# Altium PCB RECEPTORA_SECUNDARIA.PcbDoc
Units mm, origin at the board's own origin, x right, y up, seen from the top; angles counter-clockwise.
Board outline 195 x 55 mm, 2 copper layers (Top Layer, Bottom Layer); 21 components, 14 nets, 61 pads, 10 vias.
Unrouted connection lines stored in the file: 5.
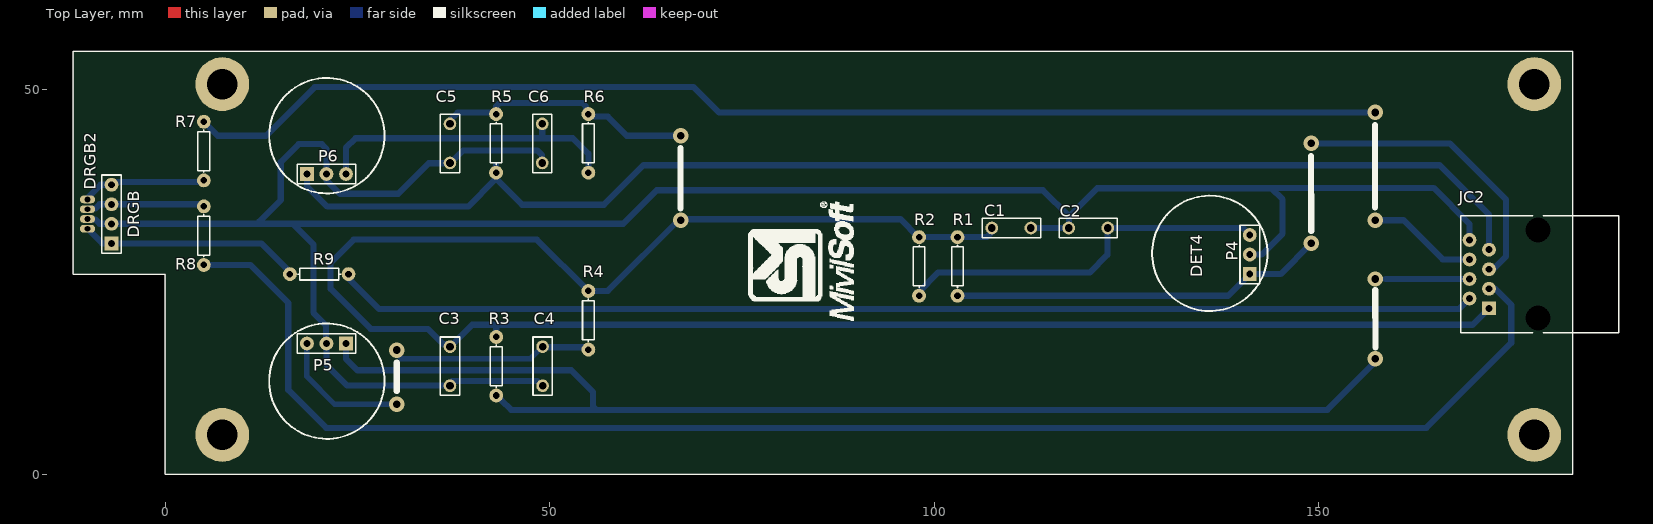
[diagram p0: Top Layer view]
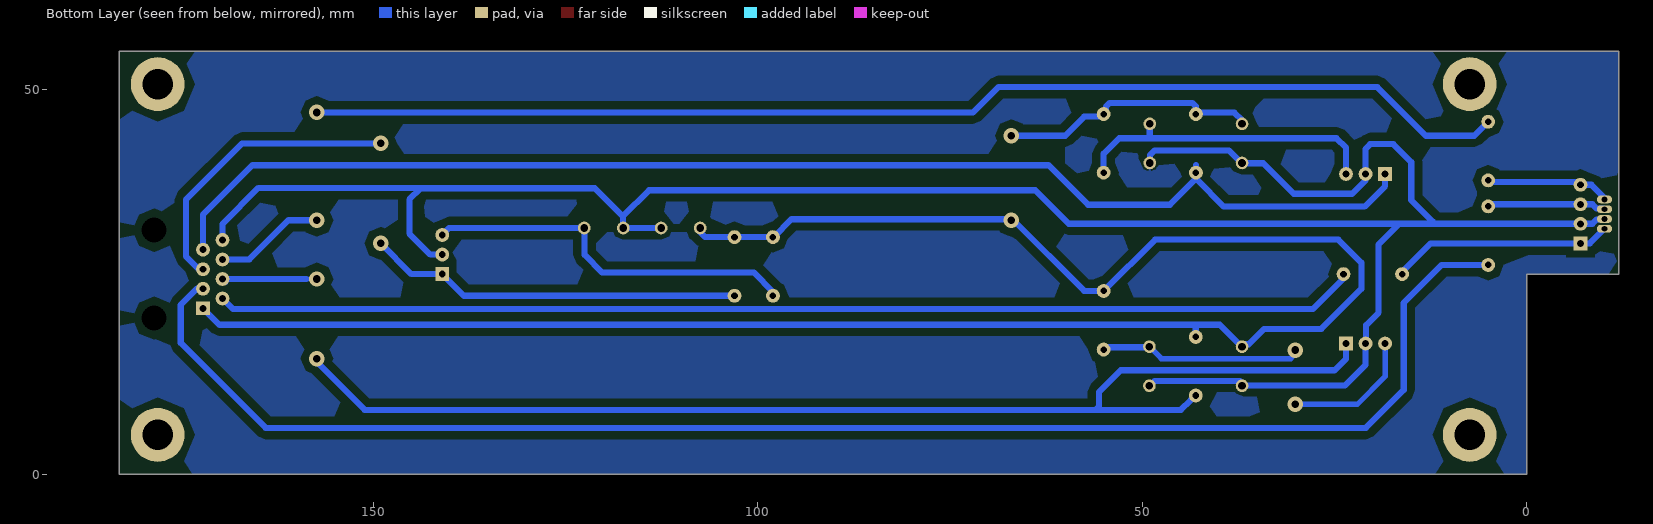
[diagram p1: Bottom Layer view, seen from below]

## Layer stack, top to bottom
Top Solder: solder mask 0.0102, Solder Resist, Dk 3.5
Top Layer: signal copper 0.0356
Dielectric 1: dielectric 0.32, FR-4, Dk 4.8
Bottom Layer: signal copper 0.0356
Bottom Solder: solder mask 0.0102, Solder Resist, Dk 3.5

## Board outline
-12,26 0,26 0,0 183,0 183,55 -12,55

## Design rules (kind name [scope] priority, off if disabled: settings)
Clearance "POLIGONO GND BOTTON" [(InNamedPolygon('GND BOTTON'))] p1: gap=1
Clearance [All] p2: gap=0.3
PolygonConnect [All] p1: connectstyle=Relief reliefconductorwidth=0.254 reliefentries=4 polygonreliefangle="90 Angle" airgapwidth=0.254
RoomDefinition RECEPTORA_SECUNDARIA [InComponentClass('RECEPTORA_SECUNDARIA')] p1: confinementstyle=ConfineIn formatcopy=TRUE lockcomponents=FALSE outline -11.95,0.075 183,0.075 183,54.975 -11.95,54.975
RoutingVias [All] p1: holewidth=0.711 width=1.27 viastyle="Through Hole" minholewidth=0.711 minwidth=1.27 maxholewidth=0.711 maxwidth=1.27
SolderMaskExpansion [All] p1: expansion=0.102
Width [All] p1: maxlimit=1 minlimit=0.7 preferedwidth=0.8
29 further rules are at their usual default settings.

## Components (designator, comment, footprint, x,y, rotation, side; value= is the part's Value field where it differs from the comment)
C1 "VP44BY224JB" VP44-2.5 110,32 r180 top
C2 "VP44BY224JB" VP44-2.5 120,32 r180 top
C3 "VP44BY224JB" VP44-2.5 37,14.025 r90 top
C4 "VP44BY224JB" VP44-2.5 49.05,14.025 r270 top
C5 "VP44BY224JB" VP44-2.5 37,43 r90 top
C6 "VP44BY224JB" VP44-2.5 49,43 r270 top
DRGB "Header 4" HDR1X4 -7,30 r90 top
DRGB2 "Header 4" FP_LRGB_TH -10.125,31.905 r90 top
JC2 "RJ45" 15-43-6233 189,26 r90 top
P4 "Header 3" HDR1X3 141,26 r90 top
P5 "Header 3" HDR1X3 23.48,16.975 r180 top
P6 "Header 3" HDR1X3 18.4,39.025 r0 top
R1 "Res" AXIAL-0.3 103,27 r90 top
R2 "Res" AXIAL-0.3 98,27 r270 top
R3 "Res" AXIAL-0.3 43.025,14.025 r90 top
R4 "Res" AXIAL-0.3 55,20 r270 top
R5 "Res" AXIAL-0.3 43,43 r90 top
R6 "Res" AXIAL-0.3 55,43 r270 top
R7 "Res" AXIAL-0.3 5,42 r90 top
R8 "Res" AXIAL-0.3 5,31 r270 top
R9 "Res" AXIAL-0.3 20,26 r0 top

## Footprints (in the part's own frame and the unit in brackets; to place one, negate y for a bottom-side part, rotate by r counter-clockwise, add the part's x,y. Pads: shape width x height; smd on the part's side, far side on the other; paste and mask are expansions set on the pad)
15-43-6233 [mm] "Connector; PCB Jack, Thru-Hole; 1-Port; Unshielded without Lightpipes; Right Angle"
  rect 1.8x1.8 hole 0.9: 1(-4.445,16.89)
  round 1.8 hole 0.9: 2(-3.175,19.43) 3(-1.905,16.89) 4(-0.635,19.43) 5(0.635,16.89) 6(1.905,19.43) 7(3.175,16.89) 8(4.445,19.43)
  round 1.8 hole 3.25 unplated: MH1(-5.715,10.54) MH2(5.715,10.54)
  silkscreen extent -7.62,0 7.62,20.58
AXIAL-0.3 [mm] "Axial Device, Thru-Hole; 2 Leads; 0.3 in Pin Spacing"
  round 1.8 hole 0.85: 1(-3.81,0) 2(3.81,0)
  silkscreen extent -2.77,-0.76 2.77,0.76
FP_LRGB_TH [mm]
  oval 1x2 hole 0.75: 1(0,0) 2(1.27,0) 3(2.54,0) 4(3.81,0)
HDR1X3 [mm] "Connector; Header; 3 Position"
  rect 1.8x1.8 hole 0.9: 1(0,0)
  round 1.8 hole 0.9: 2(2.54,0) 3(5.08,0)
  silkscreen extent -1.27,-1.27 6.35,1.27
HDR1X4 [mm] "Connector; Header; 4 Position"
  rect 1.8x1.8 hole 0.9: 1(0,0)
  round 1.8 hole 0.9: 2(2.54,0) 3(5.08,0) 4(7.62,0)
  silkscreen extent -1.27,-1.27 8.89,1.27
VP44-2.5 [mm] "Capacitor, Ceramic, Thru-Hole, Dipped Radial; Body 7.6 x 2.5 mm (WxT) Pin Spacing 5.08 mm (typ)"
  round 1.65 hole 1: 1(-2.54,0) 2(2.54,0)
  silkscreen extent -3.8,-1.25 3.8,1.25

## Part data
C1 C2 C3 C4 C5 C6: "Dipped Radial Multilayer Ceramic Capacitor X7R: 220nF, 100V"
DRGB DRGB2: "Header, 4-Pin"
JC2: library part 15-43-6233, "Right Angle, Standard Profile, RJ45-Keyed, Flange Mount PCB Jack"
P4 P5 P6: "Header, 3-Pin"
R1 R2 R3 R4 R5 R6 R7 R8 R9: library part Res1, "Resistor"

## Free pads (board coordinates)
  round 7 hole 4: 0(7.4,5.1) 0(7.4,50.7) 0(178,5.1) 0(178,50.7)

## Via types
v1: diameter 2, hole 1, Top Layer to Bottom Layer, 10 vias

## Nets (pads, with @x,y where several pads share a name; then routed paths per layer and width w, separated by ;. In a path a pad name is that pad's centre, name@x,y a point inside that pad or via, vN(x,y) a via of type N, cw(c..) or ccw(c..) an arc to the next point about the centre after c; other vN are vias at no path point)
5VCC: C1.2 C3.2 C5.2 JC2.1 R1.2 R2.1 R3.2 R4.1 R5.2 R6.1 | length 289.1
  Bottom Layer w0.8: C5.2@37,46 38,47 R5.2@42.375,47 ; R3.2 43.025,19.35 43.1,19.425 ; R5.2@43.025,47.125 43.025,47.835 43.44,48.25 54.25,48.25 54.69,47.81 54.69,47.01 55.213,46.488 57.513,46.488 60,44 v1(67,44) ; C1.2@107.5,32 107.5,31.5 106.81,30.81 R1.2 97.915,30.81 95.6,33.125 66.85,33.125 57.535,23.81 R4.1 48.31,30.5 24.5,30.5 21.475,27.475 21.475,24.1 26.7,18.875 34.125,18.875 36.125,16.875 37.35,16.875 39.9,19.425 43.1,19.425 ; JC2.1 169.98,19.425 43.1,19.425
  other v1: 67,33
DET_4: JC2.5 P4.1 R1.1 | length 87.4
  Bottom Layer w0.8: R1.1 138.19,23.19 P4.1 145,26 v1(149,30) ; v1(149,43) 167,43 174.325,35.675 174.325,28.325 172.635,26.635 JC2.5
DET_5: JC2.6 P5.1 R3.1 | length 169.9
  Bottom Layer w0.8: P5.1 23.48,14.995 24.975,13.5 52.775,13.5 55.6,10.675 55.6,8.8 55.95,8.45 ; R3.1@42.765,10.215 R3.1 ; R3.1@43.688,9.612 44.95,8.35 151.1,8.35 157,14.25 v1@157,15 ; v1(157.3,33) 161,33 166.095,27.905 JC2.6
  other v1: 157.3,15
GND: C1.1 C2.2 C3.1 C4.2 C5.1 C6.2 DRGB2.2 DRGB.2 JC2.8 P4.2 P5.2 P6.2 | length 309.5
  Bottom Layer w0.8: DRGB2.2 -10.055,33.105 -9.128,33.105 -8.563,32.54 DRGB.2 16.575,32.54 ; 12.2,32.825 15,35.625 15,40.575 17.325,42.9 20.325,42.9 20.94,42.285 P6.2 20.94,38.21 22.7,36.45 30.275,36.45 34.25,40.425 37.05,40.425 38.7,42.075 48.385,42.075 48.975,41.485 C6.2@48.975,41.075 ; P5.2@20.875,16.75 20.875,19.375 19.25,21 19.25,29.865 16.575,32.54 ; P5.2 20.94,14.21 23.61,11.54 36.715,11.54 37.3,12.125 48.375,12.125 C4.2@49,11.5 ; C1.1@112.5,32 117.5,32 117.5,33.5 ; P4.2 142.54,28.54 145.275,31.275 145.275,35.725 143.825,37.175 121.175,37.175 117.5,33.5 ; 143.35,37.2 164.9,37.2 169.57,32.53 JC2.8 ; 16.575,32.54 59.54,32.54 63.9,36.9 114.1,36.9 117.5,33.5
NetC4_1: C4.1 P5.3 R4.2 | length 43.8
  Bottom Layer w0.7: P5.3 18.4,12.7 22.025,9.075 v1@30.125,9.075 ; v1(30.075,16.125) 30.075,15.6 30.675,15 47.5,15 C4.1@49,16.5
  Bottom Layer w0.8: C4.1@49,16.5 R4.2@55,16.5
  other v1: 30.075,9.075
NetC6_1: C6.1 P6.3 R6.2 | length 39.4
  Bottom Layer w0.8: P6.3 23.48,42.43 24.725,43.675 48.825,43.675 ; C6.1 49,43.675 52.975,43.675 55,41.65 55,40.19
NetDRGB2_1: DRGB2.1 DRGB.1 R9.1 | length 28.9
  Bottom Layer w0.8: DRGB2.1 -8.22,30 DRGB.1 12.475,30 16.19,26.285 R9.1
NetDRGB2_3: DRGB2.3 DRGB.3 R8.1 | length 15.4
  Bottom Layer w0.8: DRGB2.3@-10.055,34.515 -9.128,34.515 -8.563,35.08 DRGB.3 4.73,35.08 R8.1
NetDRGB2_4: DRGB2.4 DRGB.4 R7.1 | length 15.9
  Bottom Layer w0.8: DRGB2.4@-10.125,35.925 -8.43,37.62 DRGB.4 ; DRGB.4@-7,38 4.81,38 R7.1
OUT_IR6: JC2.7 P6.1 R5.1 | length 170.2
  Bottom Layer w0.8: P6.1 18.4,37.45 21.075,34.775 39.375,34.775 42.85,38.25 ; 43,40.19 43,38.4 46.375,35.025 57.025,35.025 62.15,40.15 165.681,40.15 172.11,33.721 JC2.7
SA: JC2.3 R8.2 | length 198.7
  Bottom Layer w0.8: R8.2 11.035,27.19 15.975,22.25 15.975,10.95 20.925,6 163.95,6 175,17.05 175,22 172.905,24.095 JC2.3
SR: JC2.2 R9.2 | length 148.5
  Bottom Layer w0.8: R9.2 23.81,25.44 27.8,21.45 168.195,21.45 JC2.2
SV: JC2.4 R7.2 | length 168.5
  Bottom Layer w0.8: R7.2 6.81,44 13.1,44 19.425,50.325 68.675,50.325 72,47 v1@157.3,47 ; 158.635,25.365 JC2.4 JC2.4@169.205,25
  other v1: 157.3,25.365 157.3,47.025
VS: C2.1 P4.3 R2.2 | length 49.4
  Bottom Layer w0.8: R2.2 98,23.74 100.45,26.19 120.19,26.19 122.5,28.5 122.5,32 140.08,32 P4.3
pads on no net: JC2.MH1 JC2.MH2

## Polygon pours and split planes (outlines as drawn)
GND on Bottom Layer "GND BOTTON" (solid, pour order 3): -12,55 183,55 183,0 0,0 0,26 -12,26

## Silkscreen, mask and mechanical layers (free items; w line width, h text height)
Top Overlay:
  drawing of 872 lines, arcs and shapes, not listed
  text "DET4" at 134.825,25.575 h1.52 r90
Mechanical 1:
  lines w0.254: 184.492,1.524 185,0 ; 184.492,53.476 185,55 ; 184.746,0 185.254,0 ; 184.746,55 185.254,55 ; 185,22.396 185,0 ; 185,32.604 185,55 ; 185.508,1.524 185,0 ; 185.508,53.476 185,55
  text "55 (mm)" at 185.914,22.65 h1.52 r90